# Altium PCB ZX_UNO_Aplus_HAT1.PcbDoc
Units mil, origin at the board's own origin, x right, y up, seen from the top; angles counter-clockwise.
Board outline 3395.53 x 2214.53 mil, 2 copper layers (Top Layer, Bottom Layer); 9 components, 42 nets, 82 pads, 2 vias.
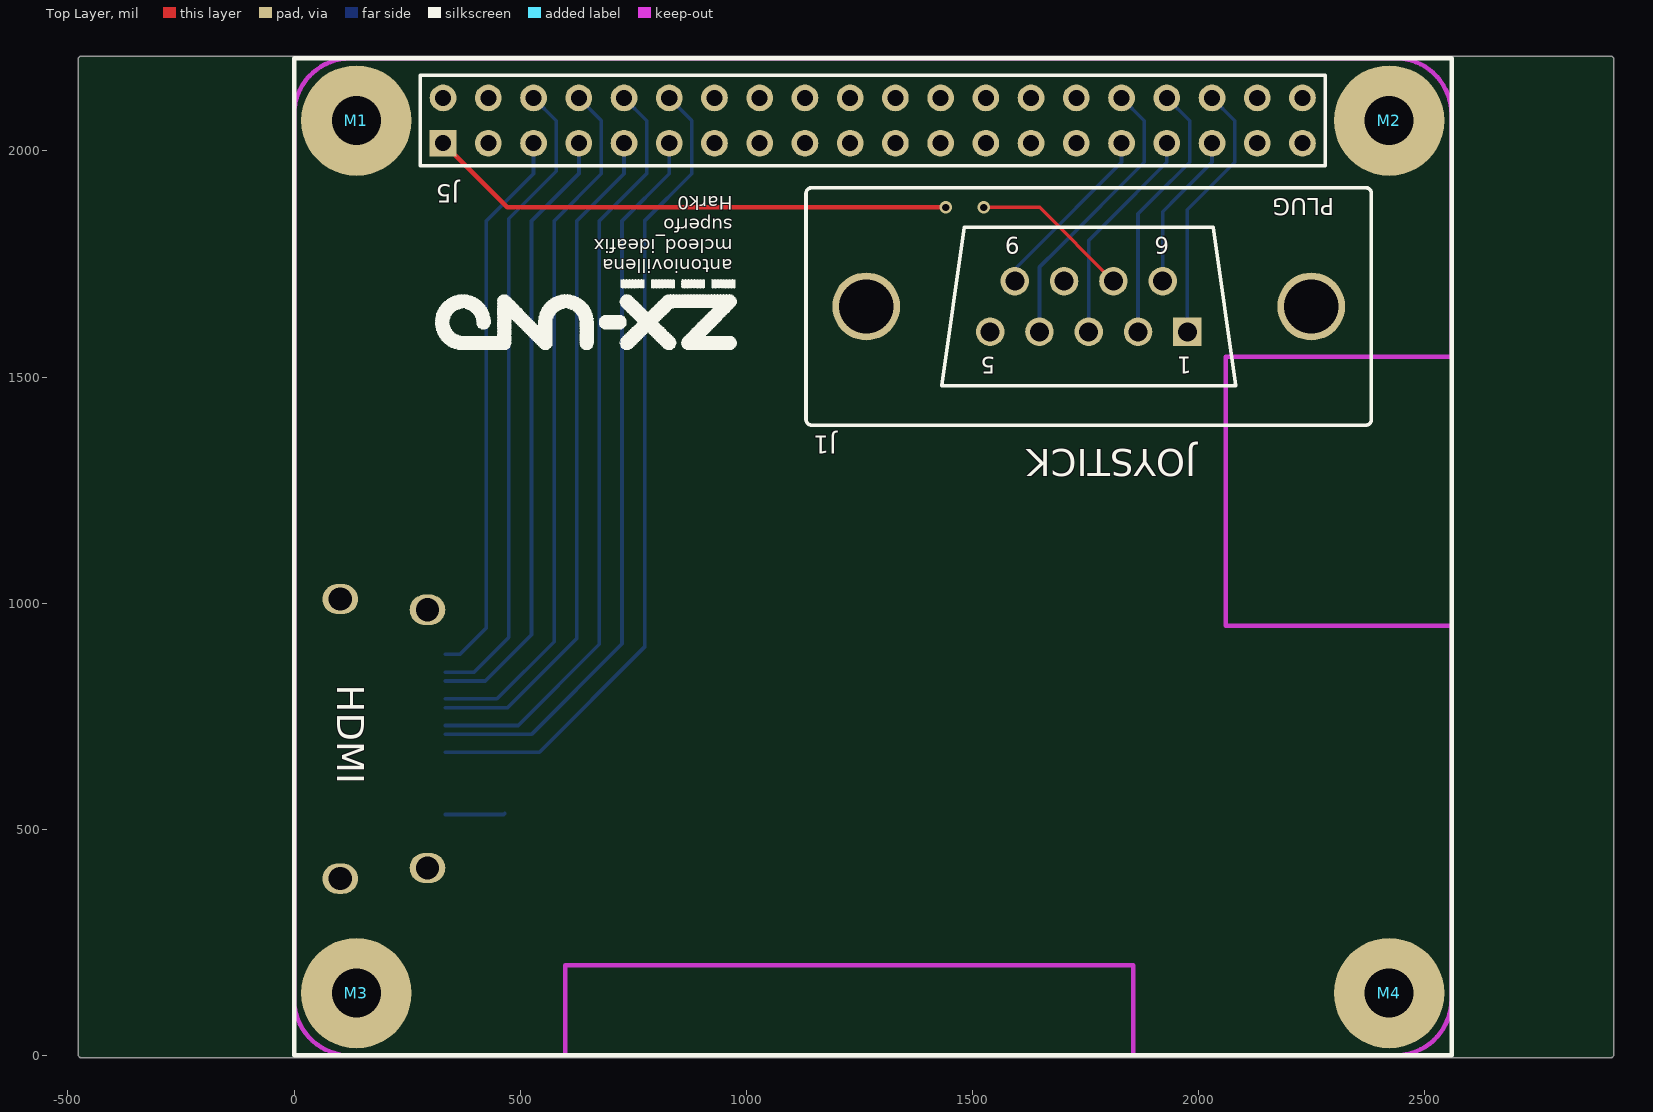
[diagram p0: Top Layer view]
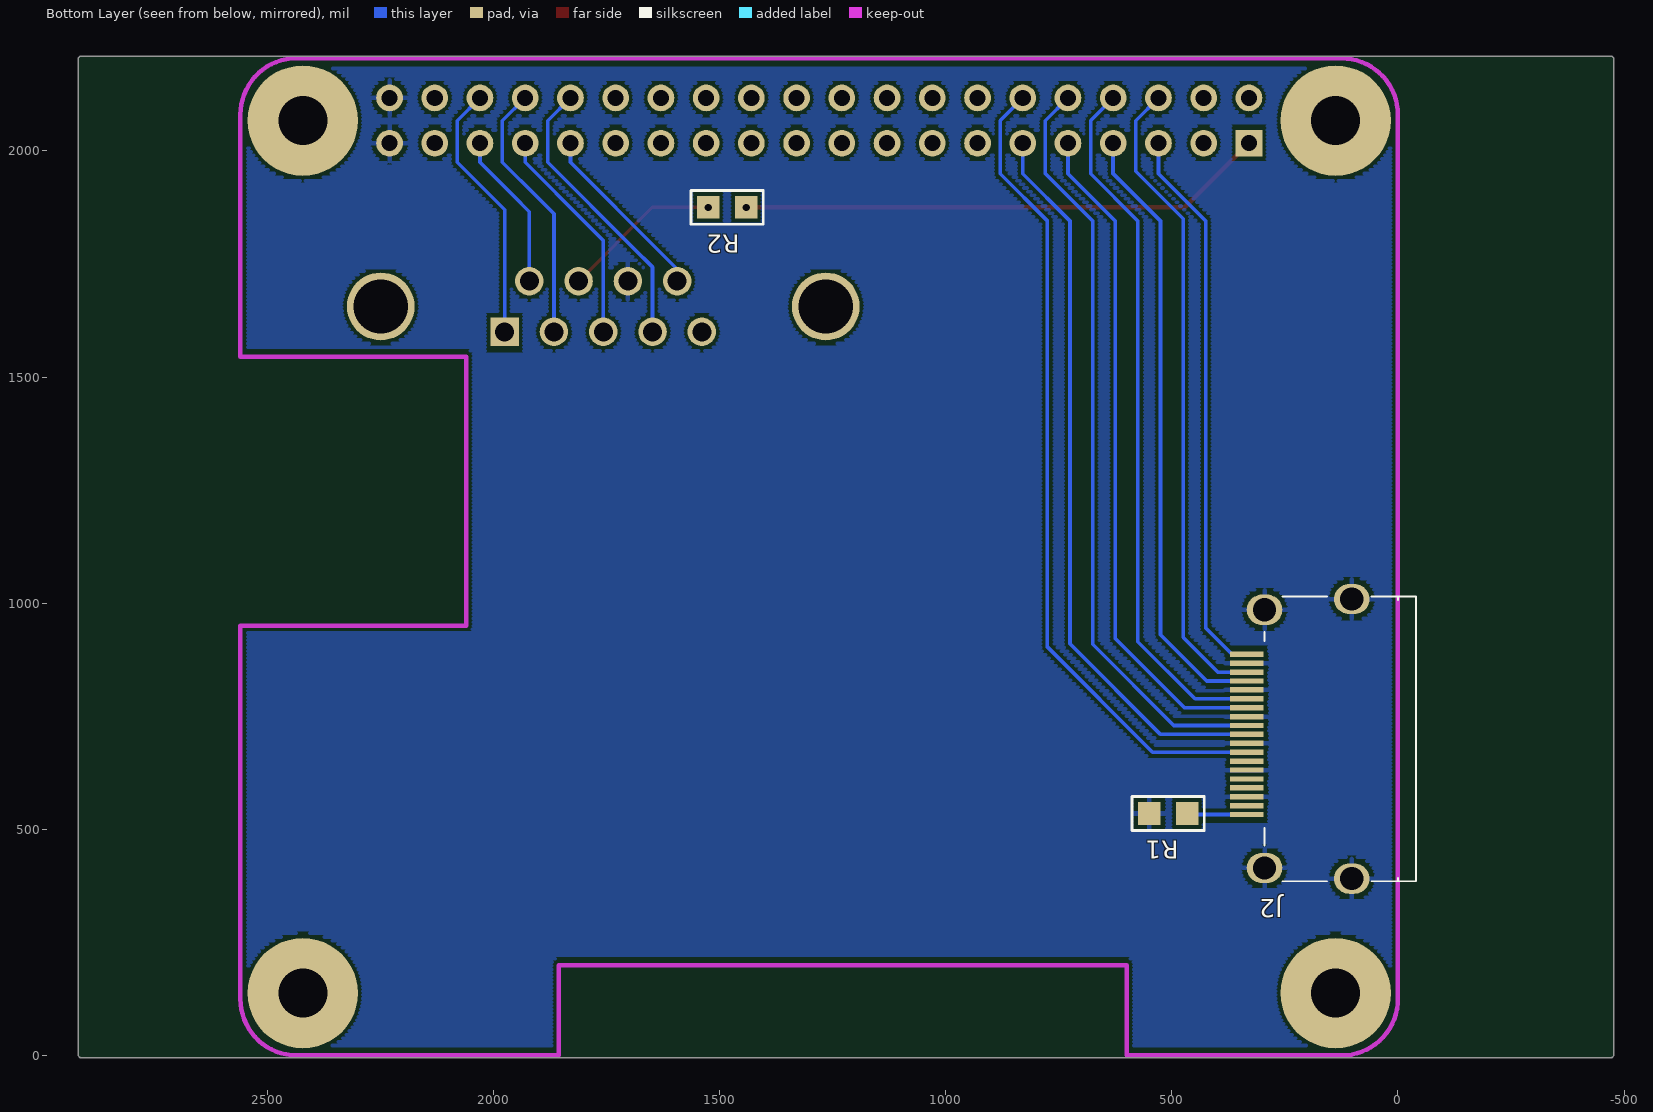
[diagram p1: Bottom Layer view, seen from below]

## Layer stack, top to bottom
Top Solder: solder mask 0.4, Solder Resist, Dk 3.5
Top Layer: signal copper 1.4
Dielectric1: core 12.6, FR-4, Dk 4.8
Bottom Layer: signal copper 1.4
Bottom Solder: solder mask 0.4, Solder Resist, Dk 3.5

## Board outline
-477.44,0 -472.44,-5 2913.09,-5 2918.09,0 2918.09,2204.53 2913.09,2209.53 -472.44,2209.53 -477.44,2204.53

## Design rules (kind name [scope] priority, off if disabled: settings)
Clearance [All] p1: gap=7
HoleSize [All] p1: absolutevalues=TRUE maxlimit=200 minlimit=1 maxpercent=80.000 minpercent=20.000
MinimumSolderMaskSliver [All] p1: minsoldermaskwidth=8
PlaneConnect [All] p1: planeconnectstyle=Relief reliefexpansion=25 reliefentries=4 reliefconductorwidth=12 reliefairgap=10
PolygonConnect [All] p1: connectstyle=Relief reliefconductorwidth=10 reliefentries=4 polygonreliefangle="90 Angle" airgapwidth=10
RoutingLayers RoutingLayers_1 [All] p1: top layer_v5=TRUE bottom layer_v5=TRUE
RoutingLayers [All] p2: top layer_v5=TRUE bottom layer_v5=TRUE
RoutingVias [All] p1: holewidth=20 width=37 viastyle="Through Hole" minholewidth=16 minwidth=28 maxholewidth=28 maxwidth=50
SilkToSilkClearance [All] p1: silktosilkclearance=5
SilkToSolderMaskClearance SilkscreenOverComponentPads [IsPad] p1: minsilkscreentomaskgap=5 clearancetoexposedcopper=TRUE
SolderMaskExpansion [All] p1: expansion=0
Width Net_Width_1 [InNet('1.2V') Or InNet('2.5V') Or InNet('3.3V') Or InNet('5V')] p1: maxlimit=12 minlimit=8 preferedwidth=10
Width [All] p2: maxlimit=12 minlimit=8 preferedwidth=10
24 further rules are at their usual default settings.

## Components (designator, comment, footprint, x,y, rotation, side; value= is the part's Value field where it differs from the comment)
J1 "JOYSTICK" DSUB/VP/TM/9 1975,1600 r180 top
J2 "HDMI Connector" "HDMI 10029449" 295,700 r90 bottom locked
J5 "Header 20X2" HDR2X20 329.53,2016.93 r0 top locked
M1 "M2.5" M2.5#1 -722.44,2050 r0 top
M2 "M2.5" M2.5#2 3177.56,2070 r0 top
M3 "M2.5" M2.5#3 -792.44,-110 r0 top
M4 "M2.5" M2.5#4 3092.56,-175 r0 top
R1 "Res1" SM/R_0805 550,535 r180 bottom (schematic designator R16)
R2 "Res1" SM/R_0805 1525,1875 r180 bottom

## Footprints (in the part's own frame and the unit in brackets; to place one, negate y for a bottom-side part, rotate by r counter-clockwise, add the part's x,y. Pads: shape width x height; smd on the part's side, far side on the other; paste and mask are expansions set on the pad)
DSUB/VP/TM/9 [mil]
  rect 63x63 hole 42: 1(0,0)
  round 63 hole 42: 2(109,0) 3(218,0) 4(327,0) 5(436,0) 6(54.5,-112) 7(163.5,-112) 8(272.5,-112) 9(381.5,-112)
  round 150 hole 120: Hole51(-274,-56) Hole52(710,-56)
  silkscreen extent -407,-319 843,207
"HDMI 10029449" [mm]
  oval 1.7x2 hole 1.3: 0(-7.85,-4.9) 0(-7.25,0) 0(7.25,0) 0(7.85,-4.9)
  rect 0.3x1.9 smd: 1(4.75,1) 2(4.25,1) 3(3.75,1) 4(3.25,1) 5(2.75,1) 6(2.25,1) 7(1.75,1) 8(1.25,1) 9(0.75,1) 10(0.25,1) 11(-0.25,1) 12(-0.75,1) 13(-1.25,1) 14(-1.75,1) 15(-2.25,1) 16(-2.75,1) 17(-3.25,1) 18(-3.75,1) 19(-4.25,1)
  silkscreen extent -8,-8.5 8,0
HDR2X20 [mm] "Connector; Header; 20x2 Position"
  rect 1.5x1.5 hole 0.9: 1(0,0)
  round 1.5 hole 0.9: 2(0,2.54) 3(2.54,0) 4(2.54,2.54) 5(5.08,0) 6(5.08,2.54) 7(7.62,0) 8(7.62,2.54) 9(10.16,0) 10(10.16,2.54) 11(12.7,0) 12(12.7,2.54) 13(15.24,0) 14(15.24,2.54) 15(17.78,0) 16(17.78,2.54) 17(20.32,0) 18(20.32,2.54) 19(22.86,0) 20(22.86,2.54) 21(25.4,0) 22(25.4,2.54) 23(27.94,0) 24(27.94,2.54) 25(30.48,0) 26(30.48,2.54) 27(33.02,0) 28(33.02,2.54) 29(35.56,0) 30(35.56,2.54) 31(38.1,0) 32(38.1,2.54) 33(40.64,0) 34(40.64,2.54) 35(43.18,0) 36(43.18,2.54) 37(45.72,0) 38(45.72,2.54) 39(48.26,0) 40(48.26,2.54)
  silkscreen extent -1.27,-1.27 49.53,3.81
M2.5#1 [mm]
  round 6.2 hole 2.75: ""(21.85,0.43)
M2.5#2 [mm]
  round 6.2 hole 2.75: ""(-19.21,-0.078)
M2.5#3 [mm]
  round 6.2 hole 2.75: ""(23.628,6.294)
M2.5#4 [mm]
  round 6.2 hole 2.75: ""(-17.051,7.945)
SM/R_0805 [mil]
  rect 50x50 smd: 1(0,0) 2(84,0)
  silkscreen extent -38,-38 122,38

## Part data
J1: library part "CONNECTOR DB9"
J2: library part D-300-0056, "HDMI, SMD, R/A KDMIX-NS1-WS-B"
J5: "Header, 20-Pin, Dual row"
R1 R2: "Resistor"

## Via types
v1: diameter 28, hole 16, Top Layer to Bottom Layer, 2 vias

## Nets (pads, with @x,y where several pads share a name; then routed paths per layer and width w, separated by ;. In a path a pad name is that pad's centre, name@x,y a point inside that pad or via, vN(x,y) a via of type N, cw(c..) or ccw(c..) an arc to the next point about the centre after c; other vN are vias at no path point)
3.3V: J5.2
5V: J5.1 R2.2 | length 1170.3
  Top Layer w10: J5.1 471.46,1875 v1(1441,1875)
CLK+: J2.10 J5.11 | length 1623.8
  Bottom Layer w8: J2.10 524.84,709.84 725,910 725,1845 829.53,1949.53 J5.11
CLK-: J2.12 J5.12 | length 1814.9
  Bottom Layer w8: J2.12 542.47,670.47 775,903 775,1845 879.53,1949.53 879.53,2066.93 J5.12
D0+: J2.7 J5.9 | length 1492.4
  Bottom Layer w8: J2.7 472.1,768.9 625,921.8 625,1845 729.53,1949.53 J5.9
D0-: J2.9 J5.10 | length 1687.3
  Bottom Layer w8: J2.9 495.47,729.53 675,909.06 675,1845 780,1950 780,2066.46 J5.10
D1+: J2.4 J5.7 | length 1362.8
  Bottom Layer w8: J2.4 422.95,827.95 525,930 525,1845 630,1950 J5.7@630,2016.46
D1-: J2.6 J5.8 | length 1558.9
  Bottom Layer w8: J2.6 448.58,788.58 575,915 575,1845 679.53,1949.53 679.53,2066.93 J5.8
D2+: J2.1 J5.5 | length 1229.9
  Bottom Layer w8: J2.1 367.01,887.01 425,945 425,1845 529.53,1949.53 J5.5
D2-: J2.3 J5.6 | length 1429.4
  Bottom Layer w8: J2.3 398.36,847.64 475,924.28 475,1850 580,1955 580,2066.46 J5.6
EXT1: J5.3
EXT2: J5.4
EXT11: J5.13
EXT12: J5.14
EXT13: J5.15
EXT14: J5.16
EXT15: J5.17
EXT16: J5.18
EXT17: J5.19
EXT18: J5.20
EXT19: J5.21
EXT20: J5.22
EXT21: J5.23
EXT22: J5.24
EXT23: J5.25
EXT24: J5.26
EXT25: J5.27
EXT26: J5.28
EXT27: J5.29
EXT28: J5.30
EXT35: J5.37
EXT36: J5.38
GND: J1.8 J2.0 J2.2 J2.5 J2.8 J2.11 J2.14 J2.17 J5.39 J5.40 R1.1
JOY_DOWN: J1.2 J5.34 | length 585.1
  Bottom Layer w8: J1.2 1866,1861 1902.5,1897.5 1980,1975 1980,2066.46 J5.34
JOY_FIRE1: J1.6 J5.35 | length 350.1
  Bottom Layer w8: J1.6 1920.5,1865.5 1955,1900 2029.53,1974.53 J5.35
JOY_FIRE2: J1.9 J5.31 | length 402.7
  Bottom Layer w8: J1.9 1593.5,1738.5 1627.5,1772.5 1829.53,1974.53 J5.31
JOY_LEFT: J1.3 J5.33 | length 488.4
  Bottom Layer w8: J1.3 1757,1802 1795,1840 1929.53,1974.53 J5.33
JOY_RIGHT: J1.4 J5.32 | length 633.9
  Bottom Layer w8: J1.4 1648,1743 1690,1785 1880,1975 1880,2066.46 J5.32
JOY_UP: J1.1 J5.36 | length 581.3
  Bottom Layer w8: J1.1 1975,1870 2010,1905 2080,1975 2080,2066.46 J5.36
NetJ2_19: J2.19 R1.2 | length 132.6
  Bottom Layer w8: J2.19 463.68,532.68 R1.2
PIN5: J1.5
PIN7: J1.7 R2.1 | length 354
  Top Layer w8: v1(1525,1875) 1648.5,1875 J1.7
pads on no net: J1.Hole51 J1.Hole52 J2.13 J2.15 J2.16 J2.18 M1. M2. M3. M4.

## Polygon pours and split planes (outlines as drawn)
GND on Bottom Layer "543" (hatched Horizontal grid 8 track 8, remove dead copper, pour order 0): 2550.91,1.28 3.31,1.28 3.31,2190.65 2550.91,2190.65

## Keep-outs
Keep-Out Layer:
  lines w10: 2435,2204.53 125,2204.53 ccw(c124.77,2079.77) 0,2080 0,125 ccw(c125,125) 125,0 600,0 600,200 1855,200 1855,0 2435,0 ccw(c2434.53,124.53) 2559.06,125 2559.06,950 2060,950 2060,1545 2560,1545 ; 2435,2205 cw(c2434.53,2080.47) 2559.06,2080 2559.06,1545

## Silkscreen, mask and mechanical layers (free items; w line width, h text height)
Top Overlay:
  drawing of 11 lines, arcs and shapes, not listed
  text "Hark0" at 970,1900 h30 r180
  text "superfo" at 970,1850 h30 r180
  text "mcleod_ideafix" at 970,1805 h30 r180
  text "antoniovillena" at 970,1760 h30 r180
  text "JOYSTICK" at 1995,1340 h60 r180
  text "HDMI" at 95,820 h60 r270

## Text inside footprints (layer, text, board x,y; h text height)
J1: Top Overlay "6" at 1935,1810 h37.5 r180; Top Overlay "9" at 1605,1810 h37.5 r180; Top Overlay "5" at 1550,1545 h37.5 r180; Top Overlay "1" at 1985,1545 h37.5 r180; Top Overlay "PLUG" at 2300,1895 h37.5 r180; Mechanical 1 "6" at 1935,1810 h37.5 r180; Mechanical 1 "9" at 1605,1810 h37.5 r180; Mechanical 1 "5" at 1550,1545 h37.5 r180; Mechanical 1 "1" at 1985,1545 h37.5 r180; Mechanical 1 "PLUG" at 2300,1895 h37.5 r180